# EAGLE board ogx360 (EAGLE 9.6.2)
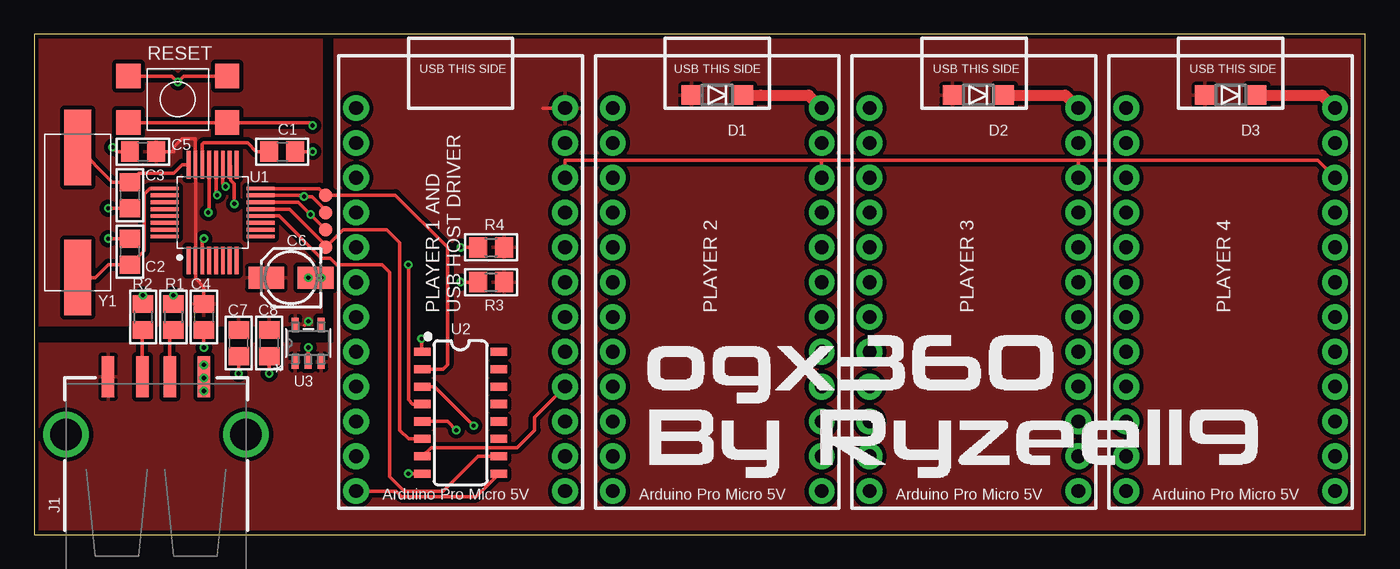
[diagram p0: board, top side]
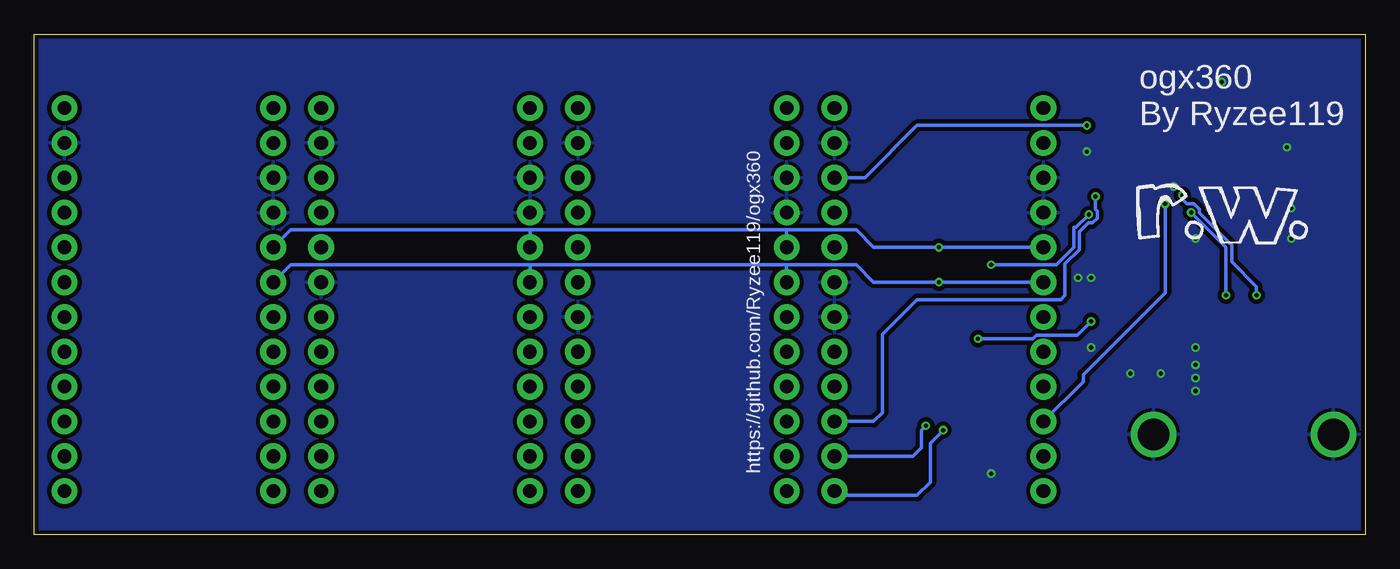
[diagram p1: board, bottom side, seen from below]

Size 97.13 x 36.5 mm. Coordinates in mm from the lower left corner, seen from the top.
Outline: 0,0 97.13,0 97.13,36.5 0,36.5 0,0
Copper layers (1*16): Top 0.035mm / dielectric 1.5mm / Bottom 0.035mm
Design rules "Elecrow_2-layer_eagle_rule": minimum track width 6mil, minimum drill 12mil, track to track 6mil, track to pad 6mil, pad to pad 6mil, via to via 6mil, smd to smd 0mil, copper to edge 10mil, drill to drill 10mil, minimum pad ring 10mil, minimum via ring 6mil, stop-mask expansion 2mil, vias tented up to drill 100mil, thermal gap 10mil

## Footprints (pad centres in the part's own frame; a part is rotated, then mirrored left to right if it is on the bottom)
C0805 = smd 1.3 x 1.5: 1 -0.95,0; 2 0.95,0
153CLV-0405 = smd 2.6 x 1.6: + 1.8,0; - -1.8,0
SOD123 = smd 1.4 x 1.4: A 1.9,0; C -1.9,0
USB-A-S-NOSILK-FEMALE = smd 3 x 0.9: D+ 6.752,-1; D- 6.752,1; GND 6.752,-3.5; VBUS 6.752,3.5 | drill 2.311: SHLD1 2.54,-6.566; SHLD2 2.54,6.566
R0805 = smd 1.3 x 1.5: 1 -0.95,0; 2 0.95,0
TL3305AF160QG = smd 1.778 x 1.778: P$1 -3.6,-1.7; P$2 3.6,-1.7; P$3 -3.6,1.7 | smd 1.778 x 1.779: P$4 3.6,1.7
TP10R = smd 1 x 1: TP 0,0
TQFP32-5X5MM = smd 2.032 x 0.28: 1 -3.496,1.75; 2 -3.496,1.25; 3 -3.496,0.75; 4 -3.496,0.25; 5 -3.496,-0.25; 6 -3.496,-0.75; 7 -3.496,-1.25; 8 -3.496,-1.75; 17 3.496,-1.75; 18 3.496,-1.25; 19 3.496,-0.75; 20 3.496,-0.25; 21 3.496,0.25; 22 3.496,0.75; 23 3.496,1.25; 24 3.496,1.75 | smd 0.28 x 2.032: 9 -1.75,-3.496; 10 -1.25,-3.496; 11 -0.75,-3.496; 12 -0.25,-3.496; 13 0.25,-3.496; 14 0.75,-3.496; 15 1.25,-3.496; 16 1.75,-3.496; 25 1.75,3.496; 26 1.25,3.496; 27 0.75,3.496; 28 0.25,3.496; 29 -0.25,3.496; 30 -0.75,3.496; 31 -1.25,3.496; 32 -1.75,3.496
SO16 = smd 0.6 x 1.2: 1 -4.445,-2.8; 2 -3.175,-2.8; 3 -1.905,-2.8; 4 -0.635,-2.8; 5 0.635,-2.8; 6 1.905,-2.8; 7 3.175,-2.8; 8 4.445,-2.8; 9 4.445,2.8; 10 3.175,2.8; 11 1.905,2.8; 12 0.635,2.8; 13 -0.635,2.8; 14 -1.905,2.8; 15 -3.175,2.8; 16 -4.445,2.8
SOT-23-5_M5_MCH = smd 0.978 x 0.508: 1 -1.365,0.95; 2 -1.365,0; 3 -1.365,-0.95; 4 1.365,-0.95; 5 1.365,0.95
ARDUINO_LEONARDO_MICRO = drill 1 pad 1.88: P$1 16.51,29.21; P$2 16.51,26.67; P$3 16.51,24.13; P$4 16.51,21.59; P$5 16.51,19.05; P$6 16.51,16.51; P$7 16.51,13.97; P$8 16.51,11.43; P$9 16.51,8.89; P$10 16.51,6.35; P$11 16.51,3.81; P$12 16.51,1.27; P$13 1.27,1.27; P$14 1.27,3.81; P$15 1.27,6.35; P$16 1.27,8.89; P$17 1.27,11.43; P$18 1.27,13.97; P$19 1.27,16.51; P$20 1.27,19.05; P$21 1.27,21.59; P$22 1.27,24.13; P$23 1.27,26.67; P$24 1.27,29.21
XTAL_ECS-250-18-5PX-JEM-TR = smd 5.5 x 2: 1 -4.75,0; 2 4.75,0

## Placement (x,y rotation side)
C1  100n  [C0805]  18.1,27.94 0 top
C2  16p  [C0805]  6.99,20.64 90 top
C3  16p  [C0805]  6.99,24.77 270 top
C4  100n  [C0805]  12.38,15.88 270 top
C5  100n  [C0805]  7.94,27.94 180 top
C6  10u  [153CLV-0405]  18.73,18.73 180 top
C7  100n  [C0805]  14.92,13.97 270 top
C8  100n  [C0805]  17.14,13.97 270 top
D1  [SOD123]  49.85,32.07 180 top
D2  [SOD123]  68.9,32.07 180 top
D3  [SOD123]  87.31,32.07 180 top
J1  USB_A_SMT_FEMALE_NS  [USB-A-S-NOSILK-FEMALE]  8.89,4.76 90 top
R1  33R  [R0805]  10.16,15.88 270 top
R2  33R  [R0805]  7.94,15.88 270 top
R3  2k  [R0805]  33.34,18.41 0 top
R4  2k  [R0805]  33.34,20.95 0 top
SW1  TL3305AF160QG  [TL3305AF160QG]  10.48,31.75 0 top
TP1  TPTP10R  [TP10R]  21.27,24.77 0 top
TP2  TPTP10R  [TP10R]  21.27,22.23 0 top
TP3  TPTP10R  [TP10R]  21.27,20.95 0 top
TP4  TPTP10R  [TP10R]  21.27,23.5 0 top
U1  MAX3421ETQFP32-5MM  [TQFP32-5X5MM]  13.02,23.5 90 top
U2  74HC4050  [SO16]  31.11,8.89 270 top
U3  MIC5219-3.3YM5-TR  [SOT-23-5_M5_MCH]  20,13.97 90 top
U4  ARDUINO_LEONARDO_MICRO  [ARDUINO_LEONARDO_MICRO]  22.22,1.91 0 top
U5  ARDUINO_LEONARDO_MICRO  [ARDUINO_LEONARDO_MICRO]  40.96,1.91 0 top
U6  ARDUINO_LEONARDO_MICRO  [ARDUINO_LEONARDO_MICRO]  59.69,1.91 0 top
U7  ARDUINO_LEONARDO_MICRO  [ARDUINO_LEONARDO_MICRO]  78.42,1.91 0 top
Y1  12MHz  [XTAL_ECS-250-18-5PX-JEM-TR]  3.17,23.5 90 top

## Library data of the parts
C1-C8 = rcl; SPICEPREFIX: C
D1-D3 = diode
J1 = SparkFun-Connectors; PROD_ID: CONN-09520; SF_ID: PRT-09011
R1-R4 = rcl; SPICEPREFIX: R
SW1 U4-U7 = my-library
TP1-TP4 = testpad
U1 = my-library; VALUE: MAX3421
U2 = SparkFun-IC-Comms; PROD_ID: IC-09604
U3 = my-library; BUILT_BY: EMA_Jessica; COPYRIGHT: Copyright (C) 2018 Accelerated Designs. All rights reserved; MANUFACTURER_PART_NUMBER: MIC5219-3.3YM5-TR; SOURCELIBRARY: Microchip_2019-08-23_3; VENDOR: Microchip
Y1 = ECS-250-18-5PX-JEM-TR; DESCRIPTION: 25MHz ±20ppm Crystal 18pF 30 Ohms HC-49/US; DIGI-KEY_PART_NUMBER: XC2083CT-ND; MF: ECS Inc.; MP: ECS-250-18-5PX-JEM-TR; PACKAGE: HC49/US ECS International; PURCHASE-URL: https://pricing.snapeda.com/search/part/ECS-250-18-5PX-JEM-TR/?ref=eda

## Nets
+3V3: C4.1 C5.1 C6.+ C7.1 C8.1 U1.2 U1.23 U2.1 U3.5
+5V: D1.A D2.A D3.A J1.VBUS R3.2 R4.2 U3.1 U3.3 U4.P$1
+5V_SLAVE1: D1.C U5.P$1
+5V_SLAVE2: D2.C U6.P$1
+5V_SLAVE3: D3.C U7.P$1
AT_MOSI: U2.3 U4.P$11
AT_RES: U2.9 U4.P$13
AT_SCK: U2.7 U4.P$9
AT_SS: U2.5 U4.P$12
D_N: R2.1 U1.20
D_P: R1.1 U1.21
GND: C1.2 C2.2 C3.2 C4.2 C5.2 C6.- C7.2 C8.2 J1.GND J1.SHLD1 J1.SHLD2 SW1.P$3 SW1.P$4 U1.3 U1.19 U2.8 U3.2 U4.P$2 U4.P$6 U4.P$7 U4.P$21 U4.P$22 U5.P$2 U5.P$7 U5.P$21 U5.P$22 U6.P$2 U6.P$6 U6.P$21 U6.P$22 U7.P$2 U7.P$21 U7.P$22
I2C_SCL: R3.1 U4.P$19 U5.P$19 U6.P$19 U7.P$19
I2C_SDA: R4.1 U4.P$20 U5.P$20 U6.P$20 U7.P$20
MAX_INT: U1.18 U4.P$15
MAX_MISO: TP4.TP U1.15 U4.P$10
MAX_MOSI: TP1.TP U1.16 U2.2
MAX_RES: U1.12 U2.10
MAX_SCK: TP3.TP U1.13 U2.6
MAX_SS: TP2.TP U1.14 U2.4
N$5: J1.D+ R1.2
N$8: J1.D- R2.2
N$9: C2.1 U1.25 Y1.1
N$10: C3.1 U1.24 Y1.2
RESET: SW1.P$1 SW1.P$2 U4.P$3 U5.P$3 U6.P$3 U7.P$3
VBCOMP: C1.1 U1.22

## Tracks (layer width: path | path; a pad name or v marks a point on that pad's centre or on a via)
+3V3  (via drill 0.3)
  Top 0.254: U2.1 28.26,13.39 v28.26,14.29 | v20,15.56 19.72,15.27 | C4.1 12.38,18.1 11.77,18.71 U1.2 U1.23 11.75,27.01 11.75,28.89 10.79,28.89 10.16,28.26 10.16,27.94 C5.1
  Bottom 0.254: v28.26,14.29 24.27,14.29 24,14.55 21.01,14.55 v20,15.56
  pour Top (isolate 0.305): -0.64,15.24 -0.64,36.83 20.95,36.83 20.95,15.24
+5V
  Top 0.254: U4.P$1 37.15,31.11
  pour Top (isolate 0.305): -0.32,13.97 21.91,13.97 21.91,37.47 98.11,37.47 98.11,-0.64 -0.32,-0.64
+5V_SLAVE1
  Top 0.813: D1.C 53.02,32.07 56.51,32.07 U5.P$1
+5V_SLAVE2
  Top 0.813: D2.C 75.25,32.07 U6.P$1
+5V_SLAVE3
  Top 0.813: D3.C 93.98,32.07 U7.P$1
AT_MOSI  (via drill 0.3)
  Top 0.254: U2.3 29.21,10.79 v32.07,7.94
  Bottom 0.254: v32.07,7.94 32.39,7.62 32.39,6.35 33.02,5.71 U4.P$11
AT_RES
  Top 0.254: U4.P$13 26.41,3.17 26.82,2.77 32.24,2.77 U2.9
AT_SCK
  Top 0.254: U2.7 28.95,6.35 35.24,6.35 36.51,7.62 36.51,8.57 U4.P$9
AT_SS  (via drill 0.3)
  Top 0.254: U2.5 30.16,8.26 v30.8,7.62
  Bottom 0.254: v30.8,7.62 31.75,6.67 31.75,3.81 32.7,2.86 38.42,2.86 U4.P$12
D_N  (via drill 0.3)
  Top 0.254: R2.1 v7.94,17.46 | U1.20 13.27,24.85 v13.35,24.77
  Bottom 0.254: v13.35,24.77 13.35,24.46 13.02,24.13 12.51,24.13 12.12,23.74 12.12,23.49 9.75,21.12 9.75,19.91 7.94,18.1 v7.94,17.46
D_P  (via drill 0.3)
  Top 0.254: R1.1 v10.16,17.46 | U1.21 12.77,23.56 v12.7,23.5
  Bottom 0.254: v10.16,17.46 10.16,20.95 v12.7,23.5
GND  (via drill 0.3)
  Top 0.254: U1.3 12.27,21.48 v12.38,21.59 | U1.19 13.77,25.6 v13.97,25.4 | C2.2 v5.4,21.59 | C3.2 v5.4,23.82 v5.4,23.81 | C5.2 6.03,27.94 v5.71,28.26 | SW1.P$3 10.05,33.45 v10.48,33.02 10.91,33.45 SW1.P$4 | C8.2 v17.15,11.75 | C7.2 v14.92,11.75 | C4.2 v12.38,13.65 | U2.8 v27.31,4.45 | C1.2 v20.32,27.94 | J1.GND 12.39,11.44 v12.38,11.43 | C6.- v20.95,18.73 | U3.2 v20,13.65
  other vias: 12.38,10.48 12.38,12.38 20,18.73
  pour Bottom (isolate 0.305): -3.18,-3.81 -3.18,41.91 109.22,41.91 109.22,0 105.41,-3.81
I2C_SCL  (via drill 0.3)
  Top 0.254: R3.1 v31.11,18.41
  Bottom 0.254: U4.P$19 v31.11,18.41 35.88,18.41 37.15,19.68 42.23,19.68 | 42.23,19.68 60.96,19.68 | 60.96,19.68 78.42,19.68 U7.P$19 | U6.P$19 60.96,19.68 | U5.P$19 42.23,19.68
I2C_SDA  (via drill 0.3)
  Top 0.254: R4.1 v31.11,20.95
  Bottom 0.254: U4.P$20 v31.11,20.95 35.88,20.95 37.15,22.23 42.23,22.23 | 42.23,22.23 60.96,22.23 | 60.96,22.23 78.42,22.23 U7.P$20 | U6.P$20 60.96,22.23 | U5.P$20 42.23,22.23
MAX_INT  (via drill 0.3)
  Top 0.254: U1.18 14.35,26.91 14.35,25.86 14.6,25.6 v14.6,24.13
  Bottom 0.254: U4.P$15 20.59,11.16 20.59,11.67 14.6,17.65 v14.6,24.13
MAX_MISO  (via drill 0.3)
  Top 0.254: U1.15 19.6,24.75 v19.68,24.66 20.27,24.66 21.27,23.66 TP4.TP
  Bottom 0.254: U4.P$10 35.88,8.26 35.24,8.89 35.24,14.61 32.7,17.14 22.22,17.14 21.91,17.46 21.91,19.75 20.87,20.79 20.87,22.08 20.2,22.74 19.92,22.74 19.57,23.1 19.57,23.6 19.68,23.72 v19.68,24.66
MAX_MOSI
  Top 0.254: U1.16 20.79,25.25 TP1.TP 26.35,24.77 30.16,20.95 30.16,12.38 29.84,12.06 U2.2
MAX_RES
  Top 0.254: U2.10 32.39,5.71 29.84,3.17 26.99,3.17 25.95,4.22 25.95,19.14 25.4,19.68 22.08,19.68 21.58,20.18 20.95,20.18 17.88,23.25 U1.12
MAX_SCK
  Top 0.254: U1.13 18.65,23.75 21.27,21.12 TP3.TP 22.54,22.23 25.72,22.23 26.67,21.27 26.67,7.62 27.31,6.99 U2.6
MAX_SS  (via drill 0.3)
  Top 0.254: U1.14 19.27,24.25 v20.17,23.35 21.27,22.25 TP2.TP | U2.4 27.62,9.53 27.31,9.84 v27.31,19.68
  Bottom 0.254: v27.31,19.68 22.54,19.68 21.27,20.95 21.27,22.42 21.1,22.42 v20.17,23.35
N$5
  Top 0.254: J1.D+ 9.89,14.65 R1.2
N$8
  Top 0.254: J1.D- 7.89,14.88 R2.2
N$9
  Top 0.254: Y1.1 4.46,18.75 5.4,19.69 C2.1 8.01,20.72 8.01,24.84 8.42,25.25 U1.25
N$10
  Top 0.254: Y1.2 5.71,25.71 C3.1 7.62,26.35 10.16,26.35 10.8,26.99 U1.24
RESET  (via drill 0.3)
  Top 0.254: SW1.P$1 SW1.P$2 20.11,30.05 v20.32,29.84 | 57.47,27.3 38.73,27.3 U4.P$3 | 57.47,27.3 76.2,27.3 | 76.2,27.3 93.66,27.3 U7.P$3 | U6.P$3 76.2,27.3 | U5.P$3 57.47,27.3
  Bottom 0.254: v20.32,29.84 32.7,29.84 36.51,26.04 U4.P$3
VBCOMP
  Top 0.254: U1.22 12.27,28.46 12.38,28.57 15.56,28.57 16.19,27.94 C1.1

## Text on the board
tPlace: RESET | USB THIS SIDE | USB THIS SIDE | USB THIS SIDE | USB THIS SIDE | PLAYER 1 AND / USB HOST DRIVER | PLAYER 2 | PLAYER 3 | PLAYER 4
bPlace: ogx360 / By Ryzee119 | https://github.com/Ryzee119/ogx360